# Altium PCB Optical Compresor_V1.PcbDoc (part 1 of 2)
Units mm, origin at the board's own origin, x right, y up, seen from the top; angles counter-clockwise.
Board outline 100 x 95 mm, 2 copper layers (Top Layer, Bottom Layer); 118 components, 73 nets, 334 pads, 87 vias.
Unrouted connection lines stored in the file: 63.
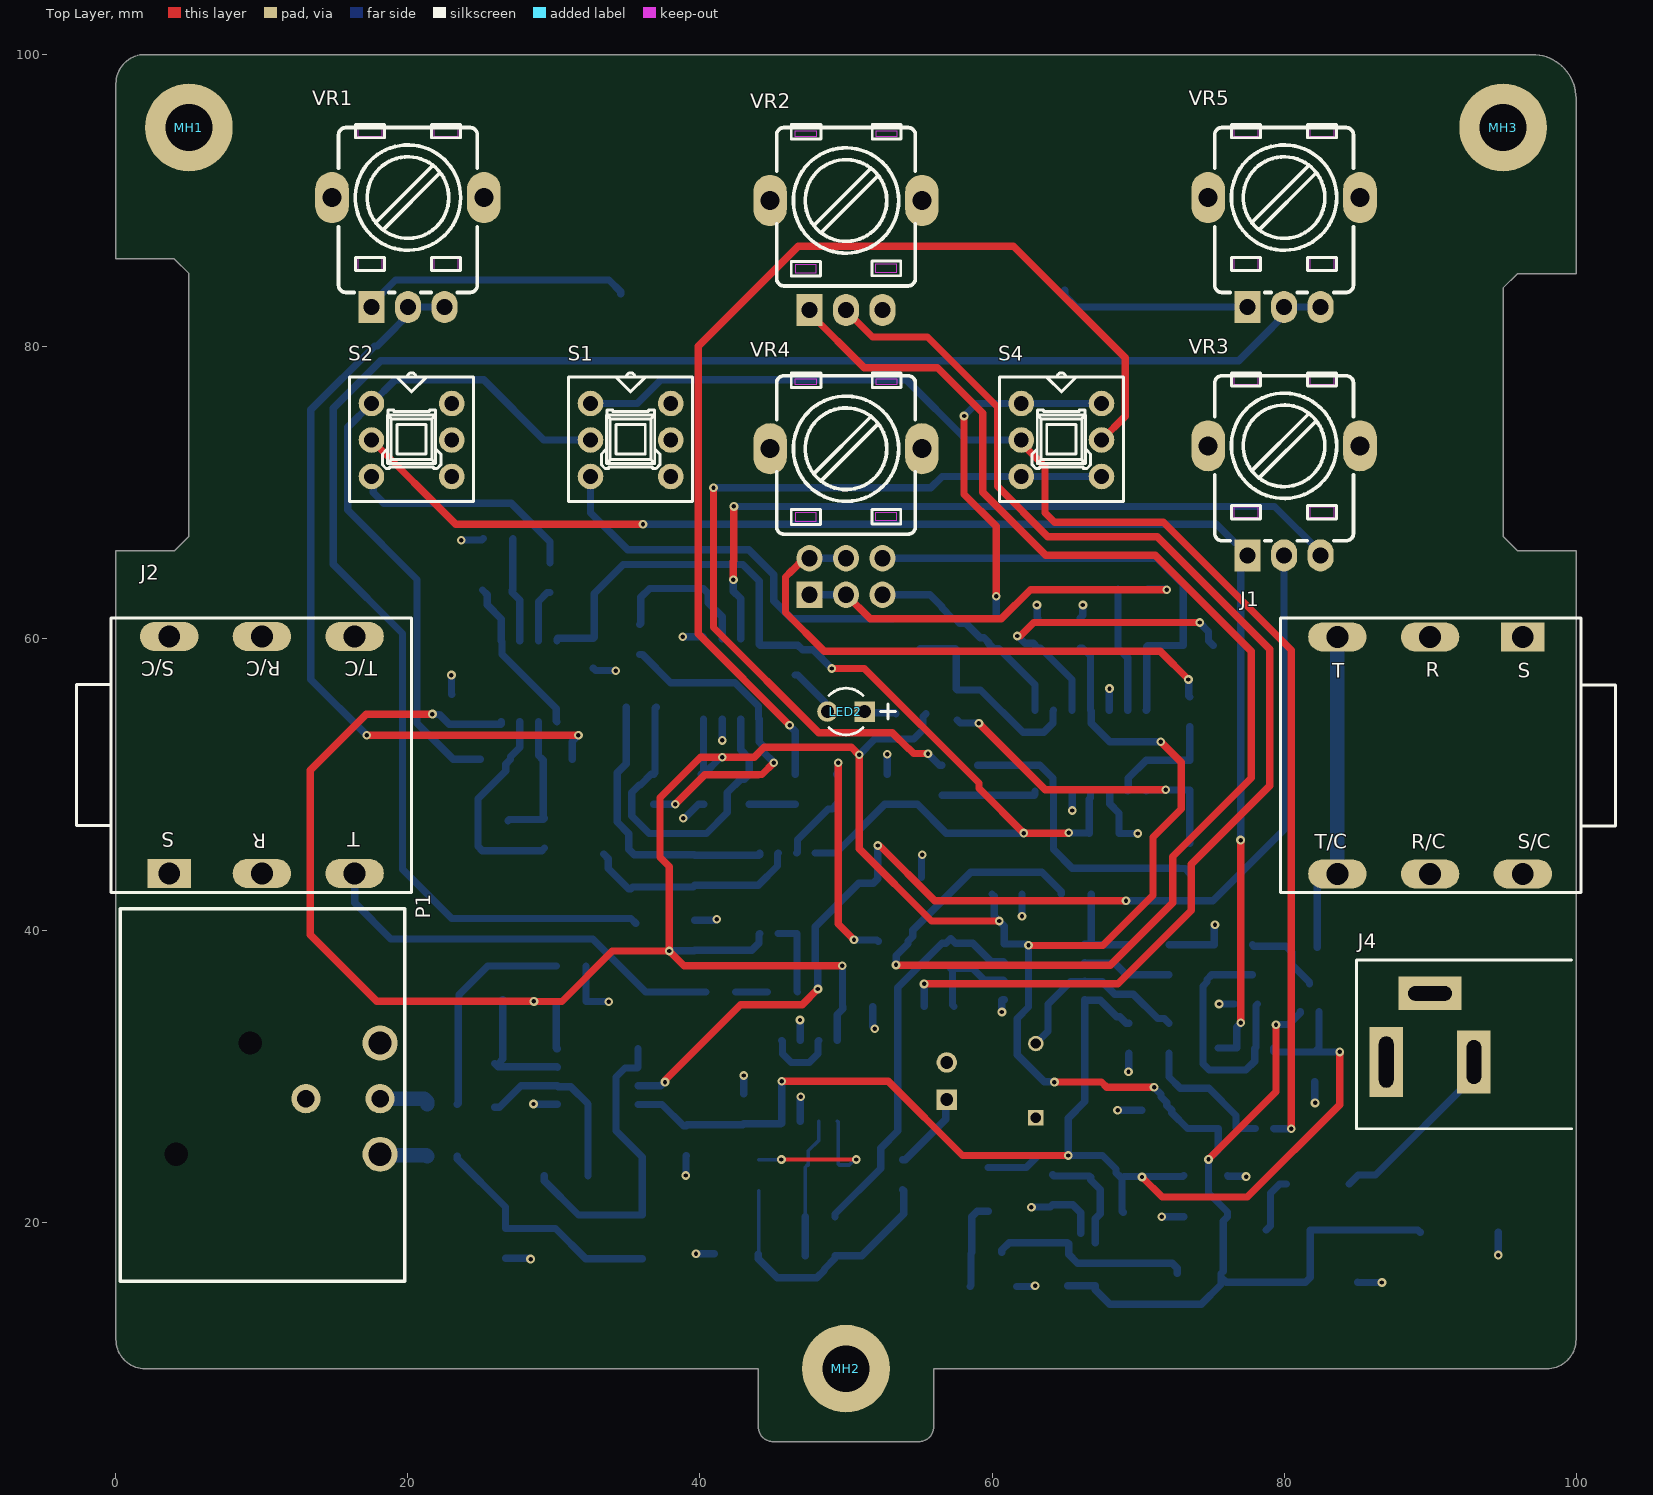
[diagram p0: Top Layer view]
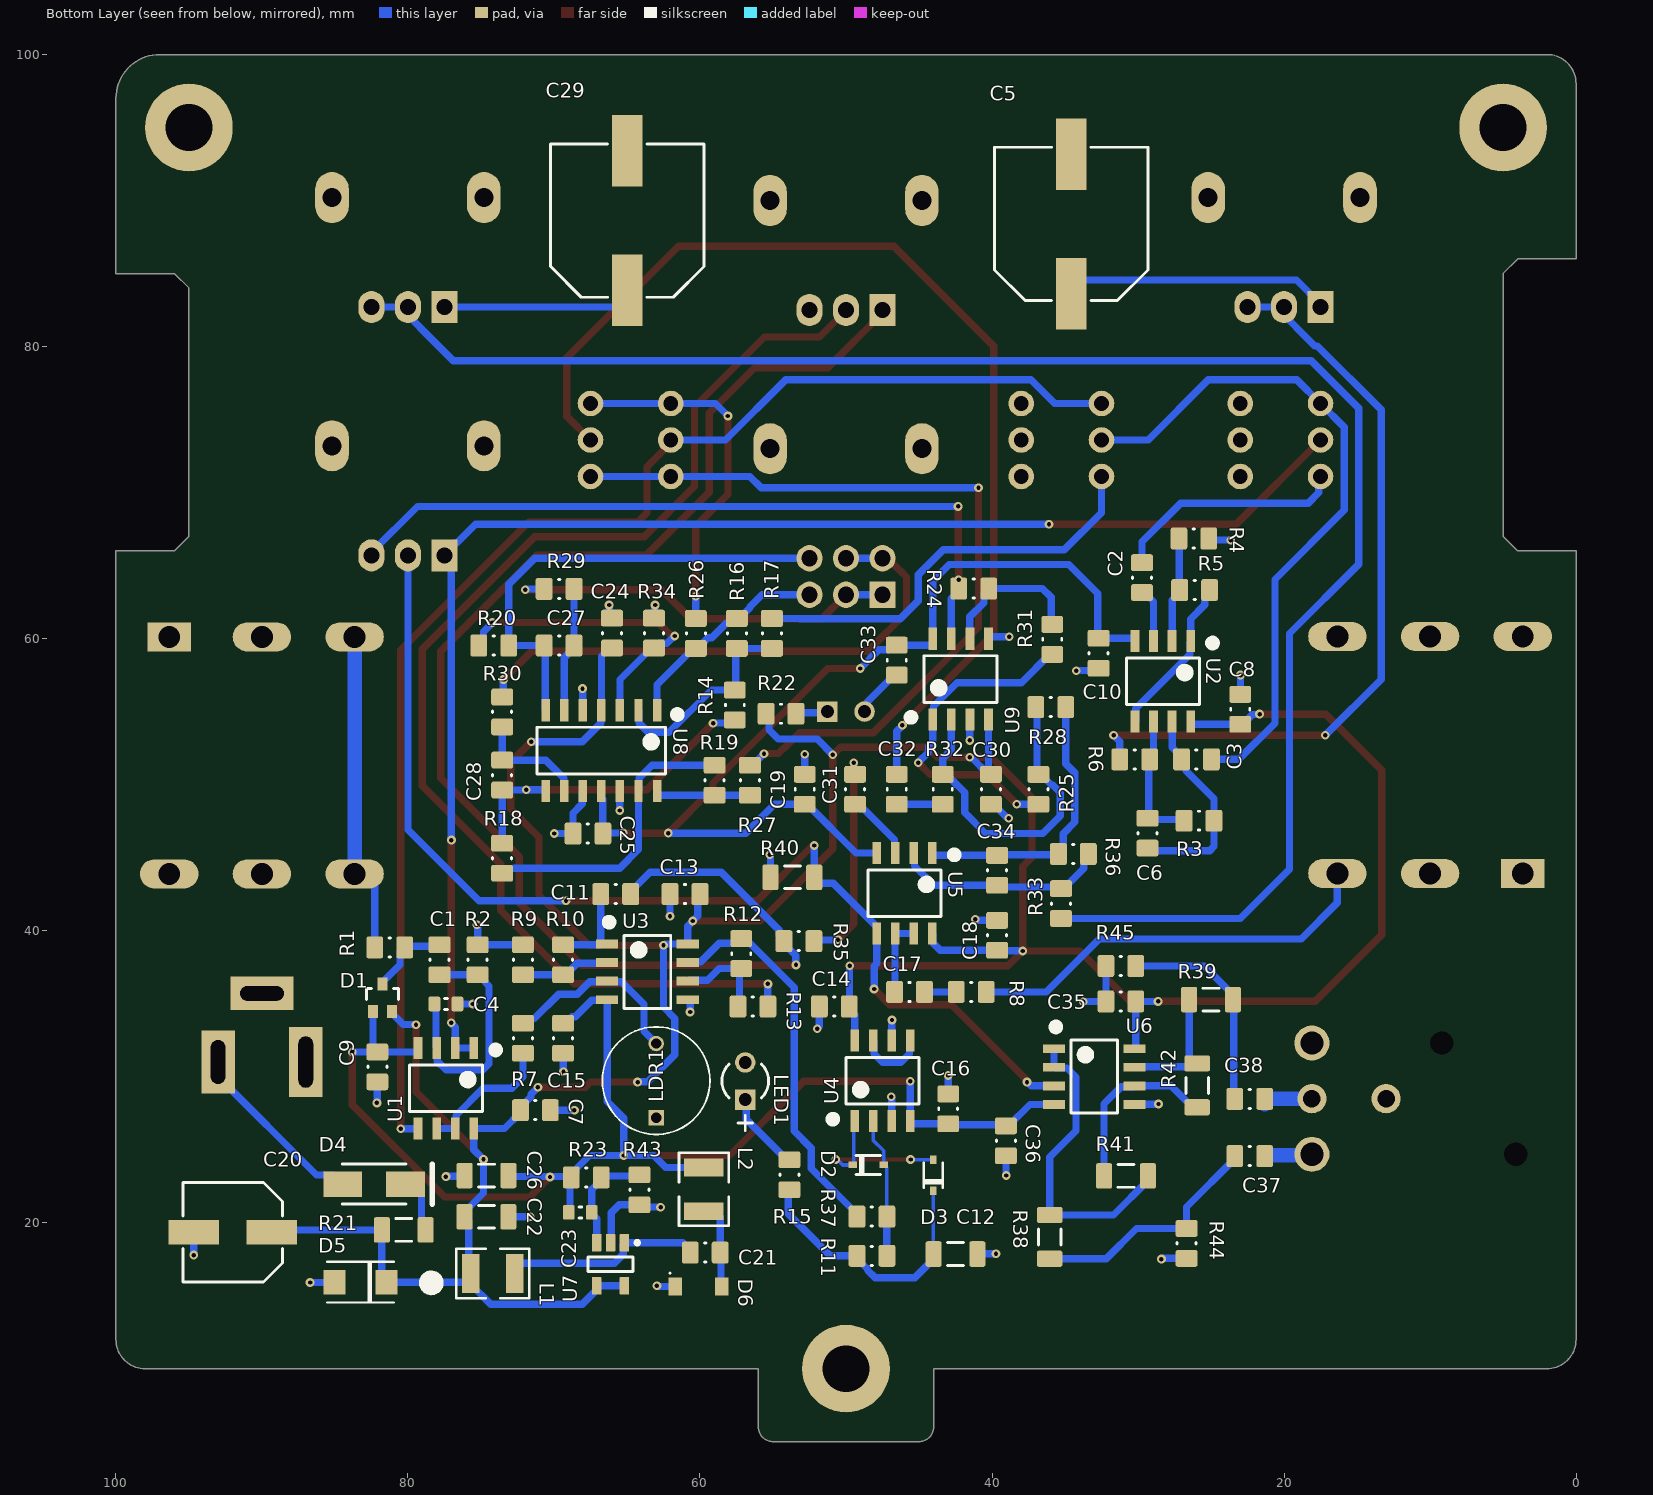
[diagram p1: Bottom Layer view, seen from below]
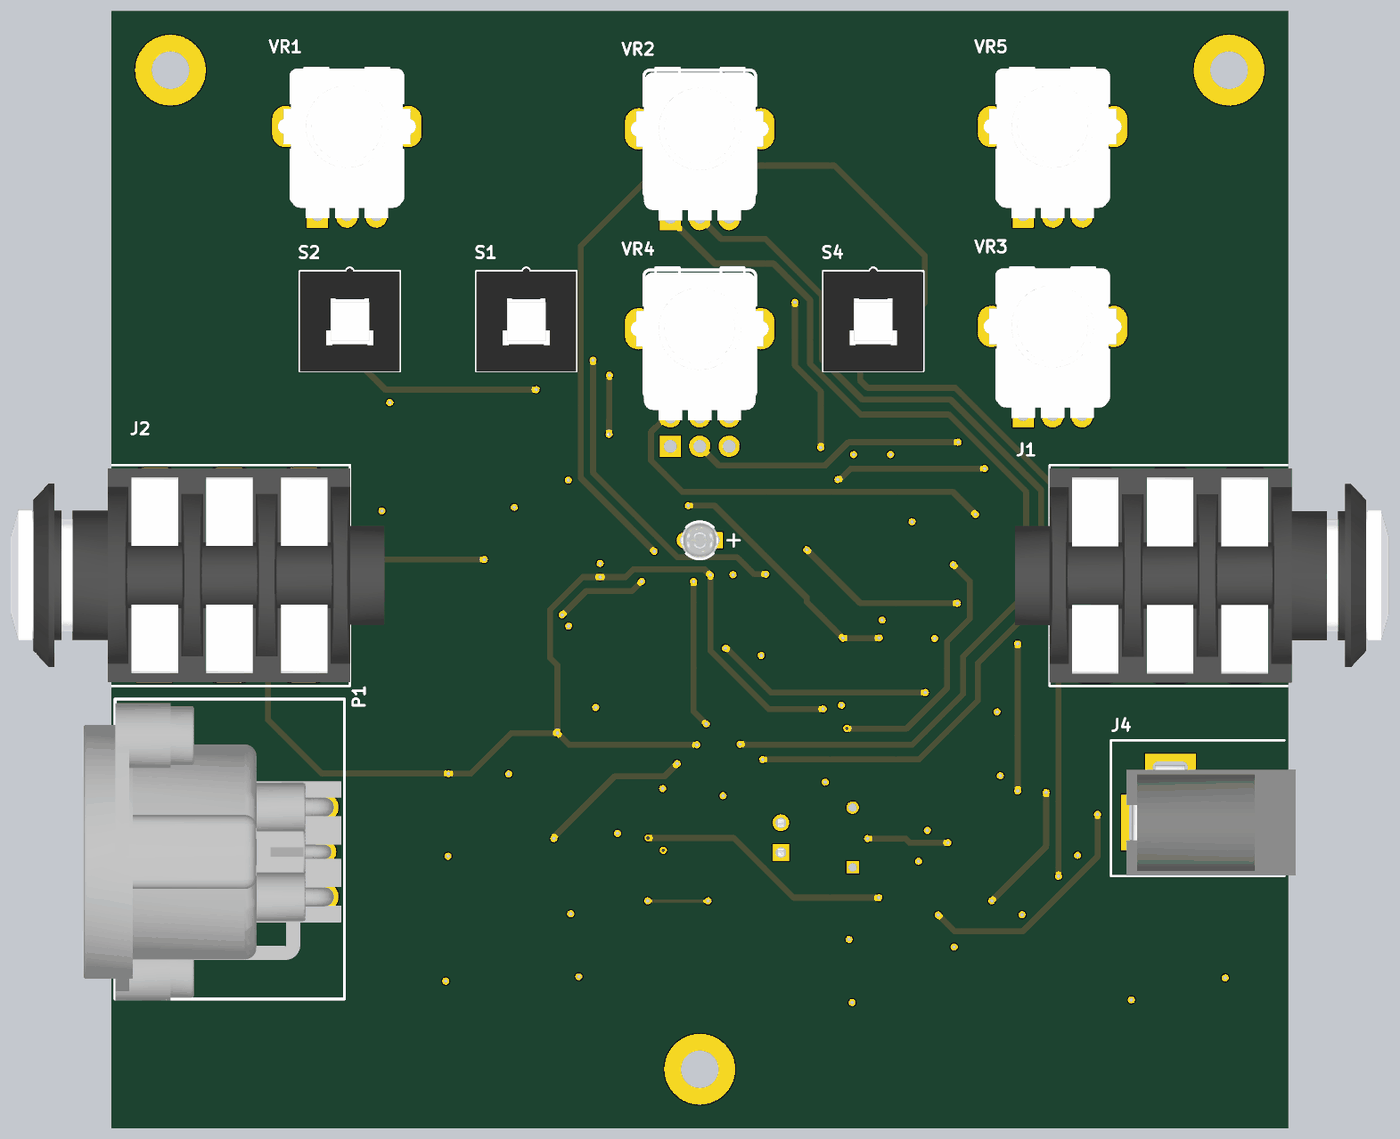
[diagram p2: 3D render of the assembled board from above, using the file's embedded part models]
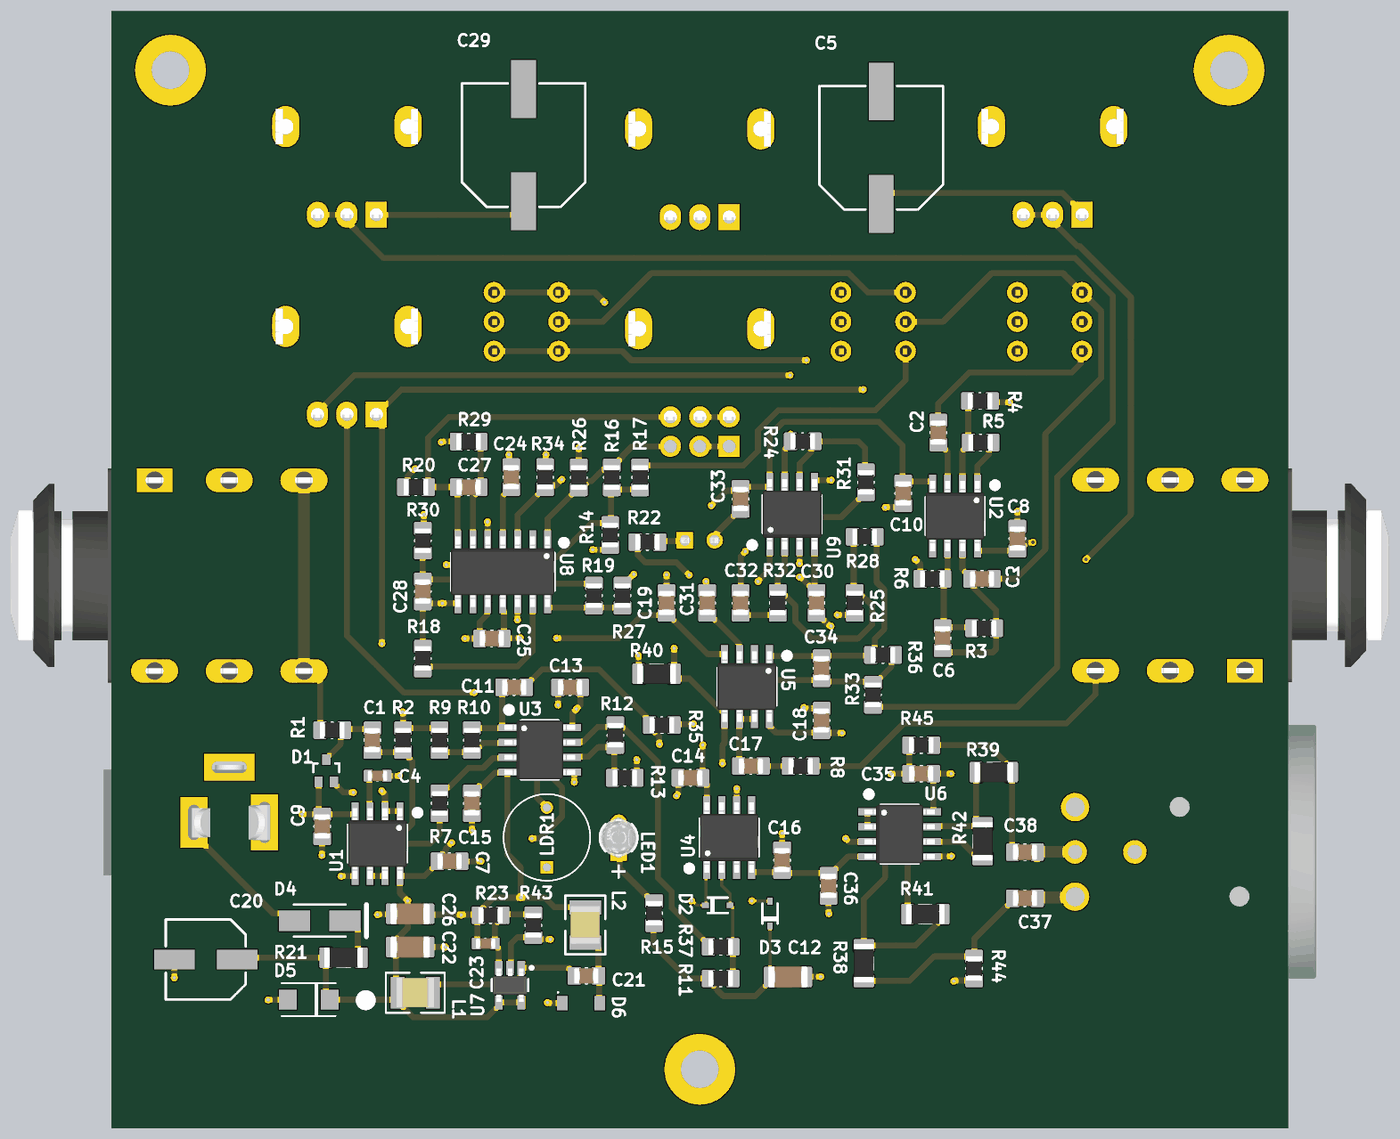
[diagram p3: 3D render of the assembled board from below, using the file's embedded part models]

## Layer stack, top to bottom
Top Solder: solder mask 0.0102, Solder Resist, Dk 3.5
Top Layer: signal copper 0.0356
Dielectric 1: dielectric 0.32, FR-4, Dk 4.8
Bottom Layer: signal copper 0.0356
Bottom Solder: solder mask 0.0102, Solder Resist, Dk 3.5

## Board outline
100,97 100,85 96,85 95,84 95,67 96,66 100,66 100,12 cw(c98,12) 98,10 56,10 56,6 cw(c55,6) 55,5 45.002,5 cw(c45,6) 44,6 44,10 2,10 cw(c2,12) 0,12 0,66 4,66 5,67 5,85 4,86 0,86 0,98 cw(c2,98) 2,100 97,100 cw(c97,97)

## Design rules (kind name [scope] priority, off if disabled: settings)
Clearance u7 [InComponent('U7')] p1: gap=0.3 ignorepadtopadclearanceinfootprint=FALSE
Clearance [All] p2: gap=0.5 ignorepadtopadclearanceinfootprint=FALSE
DiffPairsRouting [All] p1: maxlimit=0.25 minlimit=0.25 mostfreqgap=0.25 toplayer_minwidth=0.25 toplayer_maxwidth=1 toplayer_prefwidth=0.5 bottomlayer_minwidth=0.25 bottomlayer_maxwidth=1 bottomlayer_prefwidth=0.5 maxuncoupledlength=12.7
PolygonConnect [All] p1: connectstyle=Relief reliefconductorwidth=0.254 reliefentries=4 polygonreliefangle="90 Angle" airgapwidth=0.254
RoutingVias [All] p1: holewidth=0.3 width=0.6 viastyle="Through Hole" minholewidth=0.3 minwidth=0.6 maxholewidth=0.3 maxwidth=0.6
SolderMaskExpansion [All] p1: expansion=0.102 istentingtop=FALSE
Width [All] p1: maxlimit=1 minlimit=0.25 preferedwidth=0.5
29 further rules are at their usual default settings.

## Classes and differential pairs
component class S6: C20 C21 C22 C23 C26 D4 D5 D6 J4 L1 L2 LED2 R21 R22 R23 R43 U7
component class S5: C17 C18 C19 C35 C36 C37 C38 J2 P1 R8 R38 R39 R40 R41 R42 R44 R45 U6 VR3
component class S4: C29 C30 C31 C32 C33 C34 R24 R25 R28 R31 R32 R33 R35 R36 U5 U9 VR5
component class S3: C11 C12 C13 C14 C15 C16 D2 D3 LDR1 LED1 R7 R9 R10 R11 R12 R13 R15 R37 U3 U4 VR2
component class S2: C24 C25 C27 C28 R14 R16 R17 R18 R19 R20 R26 R27 R29 R30 S4 U8 VR4
component class S1: C1 C2 C3 C4 C5 C6 C7 C8 C9 C10 D1 J1 R1 R2 R3 R4 R5 R6 S2 U1 VR1
component class Main: MH1 MH2 MH3 S1
differential pair XLR_OUT: +XLR_OUT_P -XLR_OUT_N

## Components (designator, comment, footprint, x,y, rotation, side; value= is the part's Value field where it differs from the comment)
C1 "Cap 0805 100nF 4" 0805-CAP 77.837,38 r270 bottom value=100n
C2 "Cap 10nF 0805 C0G" 0805-CAP 29.725,64.175 r270 bottom
C3 "Cap 10nF 0805 C0G" 0805-CAP 26,51.725 r180 bottom
C4 "Cap 100pF 0603 C0G" 0603-CAP 77.4,34.975 r180 bottom
C5 "Cap pol 220µF 35V" "E-CAP, SMT, diameter 10mm, height 10.2mm" 34.575,88.4 r90 bottom
C6 "cap 0805 10pF" 0805-CAP 29.35,46.675 r270 bottom
C7 "Cap 0805 100nF 4" 0805-CAP 71.275,27.7 r0 bottom value=100n
C8 "Cap 0805 100nF 4" 0805-CAP 23,55.15 r270 bottom value=100n
C9 "Cap 0805 100nF 4" 0805-CAP 82.098,30.665 r270 bottom value=100n
C10 "Cap 0805 100nF 4" 0805-CAP 32.7,58.99 r270 bottom value=100n
C11 "Cap 10nF 0805 C0G" 0805-CAP 65.775,42.5 r180 bottom
C12 "Cap 1206 22uF" 1206-CAP 42.5,17.85 r0 bottom value=22uF
C13 "Cap 0805 100nF 4" 0805-CAP 61.025,42.5 r180 bottom value=100n
C14 "Cap 0805 100nF 4" 0805-CAP 50.798,34.8 r180 bottom value=100n
C15 "Cap 0805 100nF 4" 0805-CAP 69.375,32.625 r270 bottom value=100n
C16 "Cap 0805 100nF 4" 0805-CAP 43,27.791 r90 bottom value=100n
C17 "Cap 10nF 0805 C0G" 0805-CAP 45.65,35.8 r180 bottom
C18 "Cap 0805 100nF 4" 0805-CAP 39.65,39.675 r270 bottom value=100n
C19 "Cap 0805 100nF 4" 0805-CAP 52.825,49.675 r90 bottom value=100n
C20 "Cap pol 100µF 35V" "E-CAP, SMT, diameter 6.3mm, height 7.7mm" 92,19.34 r0 bottom
C21 "Cap 1µF 0805 X7R" 0805-CAP 59.645,17.95 r180 bottom
C22 "Cap 1206 22uF" 1206-CAP 74.625,20.4 r0 bottom value=22uF
C23 "Cap 0603 330pF" 0603-CAP 68.2,20.7 r0 bottom value=330pF
C24 "Cap 0805 100nF 4" 0805-CAP 66.025,60.375 r270 bottom value=100n
C25 "Cap 0805 100nF 4" 0805-CAP 67.675,46.65 r0 bottom value=100n
C26 "Cap 1206 22uF" 1206-CAP 74.625,23.225 r180 bottom value=22uF
C27 "Cap 10nF 0805 C0G" 0805-CAP 69.65,59.525 r0 bottom
C28 "Cap 10nF 0805 C0G" 0805-CAP 73.55,50.65 r270 bottom
C29 "Cap pol 220µF 35V" "E-CAP, SMT, diameter 10mm, height 10.2mm" 64.975,88.625 r90 bottom
C30 "Cap 0805 100nF 4" 0805-CAP 40.075,49.675 r90 bottom value=100n
C31 "Cap 10nF 0805 C0G" 0805-CAP 49.375,49.675 r270 bottom
C32 "Cap 10nF 0805 C0G" 0805-CAP 46.525,49.675 r270 bottom
C33 "Cap 0805 100nF 4" 0805-CAP 46.525,58.525 r270 bottom value=100n
C34 "cap 0805 10pF" 0805-CAP 39.65,44.125 r90 bottom
C35 "Cap 0805 100nF 4" 0805-CAP 31.175,35.15 r180 bottom value=100n
C36 "Cap 0805 100nF 4" 0805-CAP 39.05,25.6 r270 bottom value=100n
C37 "Cap 10nF 0805 C0G" 0805-CAP 22.35,24.55 r180 bottom
C38 "Cap 10nF 0805 C0G" 0805-CAP 22.35,28.475 r180 bottom
D1 "BAT54SWT1G" ONSC-SOT-323-3-419-04_V 81.75,35.4 r90 bottom
D2 "1N4148WS-7-F" 1N4148WS-7-F 48.475,23.95 r0 bottom
D3 "1N4148WS-7-F" 1N4148WS-7-F 44.025,23.248 r270 bottom
D4 "SS14" SS14 82.312,22.639 r180 bottom
D5 "SML4742-E3/5A" DO-214AC 85.025,15.925 r180 bottom
D6 "MBR0520-TP" SODFL370X135-2N 60.1,15.628 r180 bottom
J1 "Jack NMJ6HCD2" "Neutrik Jack metal nut" 90,52 r0 top locked
J2 "Jack NMJ6HCD2" "Neutrik Jack metal nut" 10,52.03 r180 top locked
J4 "DC Jack TH" DC_Jack 90.374,30.873 r180 top locked
L1 "15uH 20%" "1210 SMD Cap" 74.187,16.518 r180 bottom
L2 "15uH 20%" "1210 SMD Cap" 59.733,22.275 r90 bottom
LDR1 "NSL-5910" FB_28C0236-0JW-10 63,29.725 r90 bottom
LED1 "LED 3mm RED" KING-WP710A10QBCD_V 56.9,29.7 r90 bottom
LED2 "LED 3mm RED" KING-WP710A10QBCD_V 50,55 r180 top locked
MH1 "Mounting hole M3" "Mounting hole M3" 5,95 r0 top locked
MH2 "Mounting hole M3" "Mounting hole M3" 50,10 r0 top locked
MH3 "Mounting hole M3" "Mounting hole M3" 95,95 r0 top locked
P1 "Neutrik NC3MAH" "NC3MAH-0 XLR" 18.09,28.49 r90 top locked
R1 "Res 1k 1% 0805" 0805-RES 81.248,38.85 r180 bottom
R2 "Res 1M 1% 0805" 0805-RES 75.225,38 r90 bottom
R3 "Res 0805 330k 1%" 0805-RES 25.825,47.525 r180 bottom value=330k
R4 "Res 100k 1% 0805" 0805-RES 26.175,66.85 r0 bottom
R5 "Res 100k 1% 0805" 0805-RES 26.125,63.325 r180 bottom
R6 "Res 3.3k 1% 0805" 0805-RES 30.225,51.725 r180 bottom
R7 "Res 100k 1% 0805" 0805-RES 72.125,32.625 r270 bottom
R8 "Res 0805 100R 1%" 0805-RES 41.425,35.8 r0 bottom value=100R
R9 "Res 100k 1% 0805" 0805-RES 72.125,38 r90 bottom
R10 "Res 100k 1% 0805" 0805-RES 69.375,38 r270 bottom
R11 "Res 30k 1% 0805" 0805-RES 48.225,17.725 r180 bottom
R12 "Res 100k 1% 0805" 0805-RES 57.175,38.425 r90 bottom
R13 "Res 100k 1% 0805" 0805-RES 56.375,34.8 r0 bottom
R14 "Res 5.6k 1% 0805" 0805-RES 57.617,55.45 r270 bottom
R15 "Res 680R 1% 0805" 0805-RES 53.875,23.275 r270 bottom
R16 "Res 5.6k 1% 0805" 0805-RES 57.475,60.35 r90 bottom
R17 "Res 5.6k 1% 0805" 0805-RES 55.075,60.35 r270 bottom
R18 "Res 5.6k 1% 0805" 0805-RES 73.55,44.95 r270 bottom
R19 "Res 5.6k 1% 0805" 0805-RES 59,50.3 r270 bottom
R20 "Res 5.6k 1% 0805" 0805-RES 74.125,59.525 r180 bottom
R21 "Res 10R 1% 1206" 1206-RES 80.289,19.5 r0 bottom
R22 "Res 1k 1% 0805" 0805-RES 54.45,54.85 r0 bottom locked
R23 "Res 30k 1% 0805" 0805-RES 67.788,23.1 r0 bottom
R24 "Res 30k 1% 0805" 0805-RES 41.252,63.425 r0 bottom
R25 "Res 3.3k 1% 0805" 0805-RES 36.825,49.675 r270 bottom
R26 "Res 0805 100R 1%" 0805-RES 60.283,60.35 r270 bottom value=100R
R27 "Res 0805 100R 1%" 0805-RES 56.575,50.3 r270 bottom value=100R
R28 "Res 3.3k 1% 0805" 0805-RES 35.975,55.305 r0 bottom
R29 "Res 3.3k 1% 0805" 0805-RES 69.65,63.4 r180 bottom
R30 "Res 3.3k 1% 0805" 0805-RES 73.55,54.975 r270 bottom
R31 "Res 30k 1% 0805" 0805-RES 35.875,59.94 r270 bottom
R32 "Res 3.3k 1% 0805" 0805-RES 43.375,49.675 r90 bottom
R33 "Res 3.3k 1% 0805" 0805-RES 35.275,41.85 r90 bottom
R34 "Res 11.3k 1% 0805" 0805-RES 63.15,60.375 r90 bottom
R35 "Res 1k 1% 0805" 0805-RES 53.225,39.275 r180 bottom
R36 "Res 0805 330k 1%" 0805-RES 34.425,45.25 r0 bottom value=330k
R37 "Res 10k 1% 0805" 0805-RES 48.225,20.412 r0 bottom
R38 "Res 100R 1% 1206" 1206-RES 36.05,19.025 r90 bottom
R39 "Res 100R 1% 1206" 1206-RES 25,35.275 r0 bottom
R40 "Res 10k 1% 1206" 1206-RES 53.675,43.65 r180 bottom
R41 "Res 10k 1% 1206" 1206-RES 30.825,23.2 r0 bottom
R42 "Res 10k 1% 1206" 1206-RES 25.95,29.4 r90 bottom
R43 "Res 4.7k 1% 0805" 0805-RES 64.15,22.25 r270 bottom
R44 "Res 100k 1% 0805" 0805-RES 26.675,18.575 r90 bottom
R45 "Res 100k 1% 0805" 0805-RES 31.175,37.575 r0 bottom
S1 "Push Vertical Latching" "PUSH VERTICAL DPDT" 35.25,73.6 r0 top locked
S2 "Push Vertical Latching" "PUSH VERTICAL DPDT" 20.25,73.6 r0 top locked
S4 "Push Vertical Latching" "PUSH VERTICAL DPDT" 64.75,73.6 r0 top locked
U1 "TL072CD" SOIC8-127P600X175-8N 77.4,29.2 r270 bottom
U2 "MC33178D" SOIC8-127P600X175-8N 28.3,57.07 r270 bottom
U3 "TL072CD" SOIC8-127P600X175-8N 63.6,37.175 r180 bottom
U4 "TL072CD" SOIC8-127P600X175-8N 47.5,29.711 r90 bottom
U5 "MC33178D" SOIC8-127P600X175-8N 45.99,42.56 r270 bottom
U6 "TL072CD" SOIC8-127P600X175-8N 33,30 r180 bottom
U7 "LM2611BMF/NOPB" DBV0005A_M 66.125,17.15 r270 bottom
U8 "MC33179D" SOIC14-127P600X175-14N 66.75,52.325 r270 bottom
U9 "TL072CD" SOIC8-127P600X175-8N 42.15,57.225 r90 bottom
VR1 "Pot100kC 9mm" "LJV 9mm pot"#1 20,90.2 r0 top locked value=100kC
VR2 "Pot100kA 9mm" "LJV 9mm pot"#2 50,90 r0 top locked value=100kA
VR3 "Pot100kC 9mm" "LJV 9mm pot"#1 80,73.2 r0 top locked value=100kC
VR4 "Pot100kC DUAL LJV" "LJV 9MM DUAL" 50,73 r0 top locked value=100kC
VR5 "Pot100kC 9mm" "LJV 9mm pot"#1 80,90.2 r0 top locked value=100kC

## Footprints (in the part's own frame and the unit in brackets; to place one, negate y for a bottom-side part, rotate by r counter-clockwise, add the part's x,y. Pads: shape width x height; smd on the part's side, far side on the other; paste and mask are expansions set on the pad)
1N4148WS-7-F [mm] "SOD-323, 2-Leads, Body 1.7x1.3mm"
  rect 0.59x0.45 smd: 1(-1.055,0) 2(1.055,0)
  silkscreen extent -0.85,-0.65 0.85,0.65, body extent -0.85,-0.65 0.85,0.65, height 1.2
0603-CAP [mm] "Chip Capacitor, 2-Leads, Body 1.6x0.8mm, IPC Medium Density"
  rrect25% 0.8x1 smd: 1(-0.787,0) 2(0.787,0)
  silkscreen extent -0.1,-0.38 0.1,0.38, body extent -0.85,-0.45 0.85,0.45, height 0.9
0805-CAP [mm] "Chip Capacitor, 2-Leads, Body 2.00x1.25mm, IPC Low Density"
  rrect25% 1.15x1.5 smd: 1(-1.025,0) 2(1.025,0)
  silkscreen extent -0.05,-0.65 0.05,0.65, body extent -1.05,-0.67 1.05,0.68, height 1.35
0805-RES [mm] "Chip Resistor, 2-Leads, Body 2.00x1.25mm, IPC Low Density"
  rrect25% 1.15x1.5 smd: 1(-1.025,0) 2(1.025,0)
  silkscreen extent -0.05,-0.65 0.05,0.65, body extent -1.05,-0.67 1.05,0.68, height 0.6
1206-CAP [mm] "Chip Capacitor, 2-Leads, Body 3,20x1,60mm, IPC Medium Density"
  rrect25% 1.1x1.75 smd: 1(-1.5,0) 2(1.5,0)
  silkscreen extent -0.55,-0.77 0.55,0.77, body extent -1.7,-0.9 1.7,0.9, height 1.8
1206-RES [mm] "Chip Resistor, 2-Leads, Body 3,20x1,60mm, IPC Medium Density"
  rrect25% 1.1x1.75 smd: 1(-1.5,0) 2(1.5,0)
  silkscreen extent -0.55,-0.77 0.55,0.77, body extent -1.65,-0.85 1.65,0.85, height 0.65
"1210 SMD Cap" [mm] "Old footprint"
  rect 1.2x2.7 smd: 1(-1.5,0) 2(1.5,0)
  silkscreen extent -2.5,-1.7 2.5,1.7, body extent -1.6,-1.25 1.6,1.25, height 0.78
DBV0005A_M [mm] "SOT23, 5-Leads, Body 3.05x1.75mm, Pitch 0.95mm, IPC Low Density"
  rrect15% 1.2x0.65 smd: 1(-1.475,0.95) 2(-1.475,0) 3(-1.475,-0.95) 4(1.475,-0.95) 5(1.475,0.95)
  silkscreen extent -1.6,-1.55 0.5,1.95, body extent -1.42,-1.46 1.42,1.46, height 1.08
DC_Jack [mm]
  rect 2.3x4.8 hole 1 slot 3.5 at 90 deg: 1(3.374,-0.127)
  rect 2.3x4.3 hole 1 slot 3 at 90 deg: 2(-2.626,-0.127)
  rect 4.3x2.3 hole 1 slot 3 at 0 deg: 3(0.374,-4.827)
  silkscreen extent -9.33,-7.11 5.41,4.44, body extent -10.3,-5.01 4.1,4.39, height 11
DO-214AC [mil]
  rect 60x66 smd: 1(0,0) 2(140,0)
  silkscreen extent -20,-55 290,55
"E-CAP, SMT, diameter 6.3mm, height 7.7mm" [mm] "Aluminum Electrolytic Capacitor, Body 6,60x6,60x8,00mm, IPC Medium Density"
  rect 3.45x1.65 smd: 1(-2.675,0) 2(2.675,0)
  silkscreen extent -3.4,-3.4 3.4,3.4, body extent -3.4,-3.4 3.4,3.4, height 8
"E-CAP, SMT, diameter 10mm, height 10.2mm" [mm] "Aluminum Electrolytic Capacitor, Body 10,30x10,30x10,50mm, IPC Medium Density"
  rect 4.9x2.1 smd: 1(-4.775,0) 2(4.775,0)
  silkscreen extent -5.25,-5.25 5.25,5.25, body extent -5.25,-5.25 5.25,5.25, height 10.5
FB_28C0236-0JW-10 [mm]
  rect 1.06x1.06 hole 0.71: 1(-2.54,0)
  round 1.06 hole 0.71: 2(2.54,0)
  silkscreen extent -3.68,-3.68 3.68,3.68
KING-WP710A10QBCD_V [mm] "THD, 2-Leads, Dia 3.2mm"
  rect 1.4x1.4 hole 0.889 paste-0.025: 1(-1.27,0)
  round 1.4 hole 0.889 paste-0.025: 2(1.27,0)
  silkscreen extent -3.39,-1.6 1.16,1.6, body extent -1.62,-1.6 1.62,1.6, height 14.1
"LJV 9MM DUAL" [mm]
  rect 1.8x1.8 hole 1.1: 1(-2.5,-10)
  round 1.8 hole 1.1: 2(0,-10) 3(2.5,-10) 4(-2.5,-7.5) 5(0,-7.5) 6(2.5,-7.5)
  oval 2.3x3.5 hole 1.3: 7(-5.2,0) 8(5.2,0)
  Top Layer keep-out region: -2,4.75 -3.5,4.75 -3.5,4.4 -2,4.4
  Top Layer keep-out region: 3.525,4.75 2.025,4.75 2.025,4.4 3.525,4.4
  Top Layer keep-out region: 3.475,-4.375 2,-4.375 2,-4.9 3.475,-4.9
  Top Layer keep-out region: -2.025,-4.4 -3.475,-4.4 -3.475,-4.953 -2.025,-4.953
  silkscreen extent -4.75,-5.85 4.75,5.2, body extent -6.05,-7.8 6.05,4.8, height 23
"LJV 9mm pot"#1 [mm]
  rect 1.8x2.2 hole 1.1: 1(-2.5,-7.5)
  oval 1.8x2.2 hole 1.1: 2(0,-7.5) 3(2.5,-7.5)
  oval 2.3x3.5 hole 1.3: 4(-5.2,0) 5(5.2,0)
  Top Layer keep-out region: 1.751,4.2 3.451,4.2 3.451,4.9 1.751,4.9
  Top Layer keep-out region: -1.75,-4.199 -3.45,-4.199 -3.45,-4.899 -1.75,-4.899
  Top Layer keep-out region: 1.751,-4.899 3.451,-4.899 3.451,-4.199 1.751,-4.199
  Top Layer keep-out region: -1.75,4.9 -3.45,4.9 -3.45,4.2 -1.75,4.2
  silkscreen extent -4.75,-6.5 4.75,5, body extent -6.05,-7.8 6.05,4.8, height 23
"LJV 9mm pot"#2 [mm]
  rect 1.8x2.2 hole 1.1: 1(-2.5,-7.5)
  oval 1.8x2.2 hole 1.1: 2(0,-7.5) 3(2.5,-7.5)
  oval 2.3x3.5 hole 1.3: 4(-5.2,0) 5(5.2,0)
  Top Layer keep-out region: -2.025,-4.4 -3.475,-4.4 -3.475,-4.953 -2.025,-4.953
  Top Layer keep-out region: 3.475,-4.375 2,-4.375 2,-4.9 3.475,-4.9
  Top Layer keep-out region: 3.525,4.75 2.025,4.75 2.025,4.4 3.525,4.4
  Top Layer keep-out region: -2,4.75 -3.5,4.75 -3.5,4.4 -2,4.4
  silkscreen extent -4.75,-5.85 4.75,5.2, body extent -6.05,-7.8 6.05,4.8, height 23
"Mounting hole M3" [mm] "3.2 mm mounting hole for M3 screw"
  round 6 hole 3.2 paste+0: 1(0,0)
"NC3MAH-0 XLR" [mm]
  round 2.4 hole 1.6: 1(3.81,0) 2(-3.81,0)
  round 2 hole 1.2: 3(0,0) 4(0,5.08)
  round 0 hole 1.6 unplated: ""(-3.81,13.97) ""(3.81,8.89)
  silkscreen extent -12.5,-1.7 13,17.8, body extent -12.65,-1.42 12.65,20.48, height 25.25
"Neutrik Jack metal nut" [mm] "EMI Screen partno FCR14422"
  rect 3x2 hole 1.5: 1(6.35,8.115)
  oval 4x2 hole 1.5: 2(0,8.115) 3(-6.35,8.115) 4(-6.35,-8.115) 5(0,-8.115) 6(6.35,-8.115)
  silkscreen extent -10.25,-9.39 12.7,9.42, body extent -13.2,-9.1 18.6,9.1, height 15.93
ONSC-SOT-323-3-419-04_V [mm] "SOT23, 3-Leads, Body 2x1.25mm, Pitch 0.65mm"
  rect 0.9x0.7 smd: 1(-0.95,0.65) 2(-0.95,-0.65) 3(0.95,0)
  silkscreen extent -0.11,-1.1 0.63,1.1, body extent -0.63,-1 0.63,1, height 1
"PUSH VERTICAL DPDT" [mm]
  round 1.75 hole 1: 1(-2.75,0) 2(-2.75,2.5) 3(-2.75,-2.5) 4(2.75,0) 5(2.75,2.5) 6(2.75,-2.5)
  silkscreen extent -4.25,-4.2 4.25,4.6, body extent -4.25,-4.25 4.25,4.55, height 14.2
SODFL370X135-2N [mm] "SODFL, 2-Leads, Body 1.60x3.70mm, IPC Medium Density"
  rect 0.91x1.22 smd: 1(1.6,0) 2(-1.6,0)
  silkscreen extent -2,0.86 -1.91,0.96, body extent -1.42,-0.9 1.43,0.9, height 1.35
SOIC8-127P600X175-8N [mm] "SOIC, 8-Leads, Body 4,90x3,90mm, Pitch 1,27mm, IPC Medium Density"
  rect 1.52x0.6 smd: 1(-2.76,1.905) 2(-2.76,0.635) 3(-2.76,-0.635) 4(-2.76,-1.905) 5(2.76,-1.905) 6(2.76,-0.635) 7(2.76,0.635) 8(2.76,1.905)
  silkscreen extent -2.75,-2.5 1.6,3.52, body extent -3,-2.5 3,2.5, height 1.75
SOIC14-127P600X175-14N [mm] "SOIC, 14-Leads, Body 8,65x3,90mm, Pitch 1,27mm, IPC Medium Density"
  rect 1.52x0.58 smd: 1(-2.76,3.81) 2(-2.76,2.54) 3(-2.76,1.27) 4(-2.76,0) 5(-2.76,-1.27) 6(-2.76,-2.54) 7(-2.76,-3.81) 8(2.76,-3.81) 9(2.76,-2.54) 10(2.76,-1.27) 11(2.76,0) 12(2.76,1.27) 13(2.76,2.54) 14(2.76,3.81)
  silkscreen extent -2.6,-4.4 1.6,5.32, body extent -3,-4.4 3,4.4, height 1.75
SS14 [mm] "DO-214, 2-Leads, Body 4.375x2.725mm"
  rect 2.65x1.75 smd: A(-2.15,0) K(2.15,0)
  silkscreen extent -2.19,-1.36 3.98,1.36, body extent -2.19,-1.36 2.19,1.36, height 2.5

## Part data
C1 C7 C8 C9 C10 C13 C14 C15 C16 C18 C19 C24 C25 C30 C33 C35 C36: library part CMP-019-0144-11, "0.1uF 25volts C0G 5%", Design Item ID="Cap 0805 100nF 4", Fitted=Fitted, LatestRevisionDate=29-May-2009, LatestRevisionNote="IPC-7351 Footprint Added.", Mouser part=81-GRM31C5C1E104JA01, PackageDescription="Chip Capacitor", PackageReference=C1206, Published=8-Jun-2000, Publisher="Altium Limited", Source=main.SchLib
C2 C3 C11 C17 C27 C28 C31 C32 C37 C38: library part CMP-04096-2, "Cap 10nF 0805 C0G 50V +-5%", Capacitance=10nF, Dielectric=C0G, Maximum operating temperature=125°C, Rated Voltage=50V, Tolerance (+-)=5%, Height=950µm, Size (Imperial)=0805
C4: library part CMP-04086-2, "Cap 100pF 0603 C0G 50V +-5%", Capacitance=100pF, Dielectric=C0G, Maximum operating temperature=125°C, Rated Voltage=50V, Tolerance (+-)=5%, Height=900µm, Size (Imperial)=0603
C5 C29: library part CMP-00120-4, "Cap Aluminum 220uF 35V ±20% (10x10.2mm) SMD 2000h 85°C", + Tolerance=20%, Capacitance=220µF, Lifetime @ Max. Temp. (hours)=2000h, Maximum operating temperature=85°C, Rated Voltage=35V, - Tolerance=20%
C6 C34: library part CMP-019-0194-1, "Ceramic Capacitor, Multilayer, Ceramic, 25V, 5% +Tol, 5% -Tol, C0G, -/+30ppm/Cel TC, 0.00001uF, Surface Mount, 0805", Capacitance=10pF, Capacitor Type=Ceramic, Manufacturer Series=VJ, Max Operating Temperature=125°C, Min Operating Temperature=-55°C, Negative Tolerance=5%, Package Shape=Rectangular, Rated DC Voltage (URdc)=25V, Temperature Characteristics Code=C0G, Dielectric Material=Ceramic, JESD-609 Code=e3, Mount="Surface Mount", Multilayer=Yes, Number of Pins=2, Packaging="Tape and Reel", Positive Tolerance=5%, REACH SVHC=Yes, RoHS Compliant=Yes, Size Code=0805, Terminal Finish=Tin, Termination=Wraparound
C12 C22 C26: library part CMP-019-0043-11, "22uF, 25V, X5R, 20%", Capacitance=22uF, Case Code (Imperial)=1206, Case Code (Metric)=3216, Dielectric=X5R, Max Operating Temperature=85°C, Min Operating Temperature=-55°C, Tolerance=20%, Voltage Rating=25V, Case/Package=1206, Design Item ID="Cap 1206 22uF", Length=0.126inch, Mount="Surface Mount", Packaging="Tape and Reel", Pricing 1="1 = 0.72000, 10 = 0.51900, 50 = 0.51900, 100 = 0.34200, 1000 = 0.21500, 10000 = 0.15900 (USD)", RoHS=Yes, Source=main.SchLib, Stock 1=409, Thickness=0.02inch, Voltage Rating (DC)=25V, Width=0.063inch
C20: library part CMP-00119-4, "Cap Aluminum 100uF 35V ±20% (6.3x7.7mm) SMD 2000h 85°C", + Tolerance=20%, Capacitance=100µF, Lifetime @ Max. Temp. (hours)=2000h, Maximum operating temperature=85°C, Rated Voltage=35V, - Tolerance=20%
C21: library part CMP-04113-3, "Cap 1µF 0805 X7R 50V +-10%", Capacitance=1µF, Dielectric=X7R, Maximum operating temperature=125°C, Rated Voltage=50V, Tolerance (+-)=10%, Height=1.45mm, Size (Imperial)=0805
C23: library part CMP-019-0066-14, "330pF,  5%,  50V,  C0G", Capacitance=330pF, Case Code (Imperial)=0603, Case Code (Metric)=1608, Dielectric=C0G, Dielectric Material=Ceramic, Max Operating Temperature=125°C, Min Operating Temperature=-55°C, Package Quantity=1, Temperature Coefficient=30ppm/°C, Tolerance=5%, Voltage=50V, Case/Package=0603, ComponentLink1Description=https://datasheet.ciiva.com/144/docfinderpartnumber-c0603c331j5gactu-144424.pdf?src-supplier=Digi-Key, ComponentLink1URL=https://datasheet.ciiva.com/144/docfinderpartnumber-c0603c331j5gactu-144424.pdf?src-supplier=Digi-Key, ComponentLink2Description=https://datasheet.ciiva.com/14589/70095383-14589452.pdf?src-supplier=Allied+Electronics, ComponentLink2URL=https://datasheet.ciiva.com/14589/70095383-14589452.pdf?src-supplier=Allied+Electronics, ComponentLink3Description=https://datasheet.ciiva.com/7823/kem-c1003-c0g-smd-7823741.pdf?src-supplier=Element14, ComponentLink3URL=https://datasheet.ciiva.com/7823/kem-c1003-c0g-smd-7823741.pdf?src-supplier=Element14, ComponentLink4Description=https://datasheet.ciiva.com/7823/kem-c1003-c0g-smd-7823742.pdf?src-supplier=Element14, ComponentLink4URL=https://datasheet.ciiva.com/7823/kem-c1003-c0g-smd-7823742.pdf?src-supplier=Element14, ComponentLink5Description=https://datasheet.ciiva.com/14597/70095383-14597551.pdf?src-supplier=Allied+Electronics, ComponentLink5URL=https://datasheet.ciiva.com/14597/70095383-14597551.pdf?src-supplier=Allied+Electronics, Contact Material=Tin, Contact Plating=Tin,Matte, Depth=0.8mm, Design Item ID="Cap 0603 330pF", Dissipation Factor=0.5%, Height=0.8mm, Lead Free="Lead Free", Lead Pitch=0.7mm, Length=1.6mm, Mount="Surface Mount,PCB", Number of Pins=2, Packaging="Tape and Reel", Pricing 1="1=0,100000, 10=0,039000, 100=0,027000, 500=0,020000, 1000=0,016000, 4000=0,011000 (USD)", Radiation Hardening=No, REACH SVHC="No SVHC", RoHS=Yes, Source=main.SchLib, Stock 1=158995, Termination=SMD/SMT, Thickness=0.034inch, Voltage Rating=50V, Voltage Rating (DC)=50V, Width=0.8mm
D1: library part CMP-055-0001-A.2, "Rectifier Diode, Schottky, 2 Element, 0.2A, 30V V(RRM), Silicon", Average Rectified Current=200mA, Case/Package=SOT-323, Forward Voltage=800mV, Max Forward Surge Current (Ifsm)=600mA, Max Operating Temperature=125°C, Max Repetitive Reverse Voltage (Vrrm)=30V, Max Reverse Leakage Current=2uA, Min Operating Temperature=-65°C, Package Quantity=1, Power Dissipation=200mW, Contact Plating=Tin,Matte, Element Configuration=Dual, Forward Current=200mA, Height=0.9mm, Lead Free="Lead Free", Length=2.2mm, Max Reverse Voltage (DC)=30V, Max Surge Current=600mA, Mount="Surface Mount", Number of Pins=3, Packaging="Tape and Reel", Peak Non-Repetitive Surge Current=600mA, Peak Reverse Current=2uA, Radiation Hardening=No, REACH SVHC="No SVHC", Recovery Time=5ns, Reverse Recovery Time=5ns, Weight=0.03g, Width=1.35mm
D2 D3: library part CMP-029-0008-5, "Fast Switching Diode, 75 V, 0.3 A, -65 to 150 degC, 2-Pin SOD323, RoHS, Tape and Reel", Average Rectified Current=150mA, Capacitance=2pF, Current=2A, Forward Current=300mA, Forward Voltage=1.25V, Manufacturer=Pericom, Max Operating Temperature=150°C, Max Repetitive Reverse Voltage (Vrrm)=75V, Min Operating Temperature=-65°C, Package Quantity=3000, Peak Reverse Current=1uA, Power Dissipation=200mW, Available Preview Images=2D, ComponentLink1Description="Manufacturer URL", ComponentLink1URL=http://www.diodes.com/, ComponentLink2Description=Datasheet, ComponentLink2URL=http://www.diodes.com/datasheets/ds30097.pdf, ComponentLink3Description=https://datasheet.ciiva.com/16199/ds30097-16199061.pdf?src-supplier=Future+Electronics, ComponentLink3URL=https://datasheet.ciiva.com/16199/ds30097-16199061.pdf?src-supplier=Future+Electronics, ComponentLink4Description=https://datasheet.ciiva.com/16472/ds30097-16472599.pdf?src-supplier=Avnet+Asia, ComponentLink4URL=https://datasheet.ciiva.com/16472/ds30097-16472599.pdf?src-supplier=Avnet+Asia, ComponentLink5Description=https://datasheet.ciiva.com/1179/ds30097-1179355.pdf?src-supplier=Element14, ComponentLink5URL=https://datasheet.ciiva.com/1179/ds30097-1179355.pdf?src-supplier=Element14, ComponentLink6Description=https://datasheet.ciiva.com/8300/ds30097-8300396.pdf?src-supplier=Avnet, ComponentLink6URL=https://datasheet.ciiva.com/8300/ds30097-8300396.pdf?src-supplier=Avnet, ComponentLink7Description=https://datasheet.ciiva.com/911/ds30097-911741.pdf?src-supplier=Digi-Key, ComponentLink7URL=https://datasheet.ciiva.com/911/ds30097-911741.pdf?src-supplier=Digi-Key, ComponentLink8Description=https://datasheet.ciiva.com/911/ds30097-911742.pdf?src-supplier=Digi-Key, ComponentLink8URL=https://datasheet.ciiva.com/911/ds30097-911742.pdf?src-supplier=Digi-Key, ComponentLink9Description=https://datasheet.ciiva.com/25946/ds30097-25946926.pdf?src-supplier=Avnet+Europe, ComponentLink9URL=https://datasheet.ciiva.com/25946/ds30097-25946926.pdf?src-supplier=Avnet+Europe, ComponentLink10Description=https://datasheet.ciiva.com/911/ds30097-911743.pdf?src-supplier=Digi-Key, ComponentLink10URL=https://datasheet.ciiva.com/911/ds30097-911743.pdf?src-supplier=Digi-Key, ComponentLink11Description=http://datasheet.octopart.com/1N4148WS-7-F-Diodes-Inc.-datasheet-11839050.pdf?src-supplier=Newark, ComponentLink11URL=http://datasheet.octopart.com/1N4148WS-7-F-Diodes-Inc.-datasheet-11839050.pdf?src-supplier=Newark, ComponentLink12Description=http://datasheet.octopart.com/1N4148WS-7-F-Diodes-Inc.-datasheet-8329243.pdf?src-supplier=Newark, ComponentLink12URL=http://datasheet.octopart.com/1N4148WS-7-F-Diodes-Inc.-datasheet-8329243.pdf?src-supplier=Newark, ComponentLink13Description=http://datasheet.octopart.com/1N4148WS-7-F-Diodes-Inc.-datasheet-10031541.pdf?src-supplier=Newark, ComponentLink13URL=http://datasheet.octopart.com/1N4148WS-7-F-Diodes-Inc.-datasheet-10031541.pdf?src-supplier=Newark, ComponentLink14Description=http://datasheet.octopart.com/1N4148WS-7-F-Diodes-Inc.-datasheet-34441419.pdf?src-supplier=Allied+Electronics, ComponentLink14URL=http://datasheet.octopart.com/1N4148WS-7-F-Diodes-Inc.-datasheet-34441419.pdf?src-supplier=Allied+Electronics, ComponentLink15Description=http://datasheet.octopart.com/1N4148WS-7-F-Diodes-Inc.-datasheet-62305040.pdf?src-supplier=Element14, ComponentLink15URL=http://datasheet.octopart.com/1N4148WS-7-F-Diodes-Inc.-datasheet-62305040.pdf?src-supplier=Element14, ComponentLink16Description=http://datasheet.octopart.com/1N4148WS-7-F-Diodes-Inc.-datasheet-479.pdf?src-supplier=Mouser, ComponentLink16URL=http://datasheet.octopart.com/1N4148WS-7-F-Diodes-Inc.-datasheet-479.pdf?src-supplier=Mouser, ComponentLink17Description=http://datasheet.octopart.com/1N4148WS-7-F-Diodes-Inc.-datasheet-139480.pdf?src-supplier=Digi-Key, ComponentLink17URL=http://datasheet.octopart.com/1N4148WS-7-F-Diodes-Inc.-datasheet-139480.pdf?src-supplier=Digi-Key, ComponentLink18Description=http://datasheet.octopart.com/1N4148WS-7-F-Diodes-Inc.-datasheet-7284054.pdf?src-supplier=Jameco, ComponentLink18URL=http://datasheet.octopart.com/1N4148WS-7-F-Diodes-Inc.-datasheet-7284054.pdf?src-supplier=Jameco, ComponentLink19Description=http://datasheet.octopart.com/1N4148WS-7-F-Diodes-Inc.-datasheet-14053694.pdf?src-supplier=IIIC, ComponentLink19URL=http://datasheet.octopart.com/1N4148WS-7-F-Diodes-Inc.-datasheet-14053694.pdf?src-supplier=IIIC, ComponentLink20Description=http://datasheet.octopart.com/1N4148WS-7-F-Multicomp-datasheet-21397732.pdf?src-supplier=Newark, ComponentLink20URL=http://datasheet.octopart.com/1N4148WS-7-F-Multicomp-datasheet-21397732.pdf?src-supplier=Newark, ComponentLink21Description=http://datasheet.octopart.com/1N4148WS-7-F-Pericom-datasheet-62305040.pdf?src-supplier=Newark, ComponentLink21URL=http://datasheet.octopart.com/1N4148WS-7-F-Pericom-datasheet-62305040.pdf?src-supplier=Newark, Contact Plating=Tin, Current Rating=150mA, DatasheetVersion="Rev. 25-2, 03/2016", Design Item ID=1N4148WS-7-F, Element Configuration=Single, Height=1mm, Lead Free="Lead Free", Length=1.8mm, Manufacturer Part Number=1N4148WS-7-F, Max Forward Surge Current (Ifsm)=2A, Max Reverse Voltage (DC)=75V, Max Surge Current=2A, Mount="Surface Mount", Number of Pins=2, Output Current=150mA, PackageDescription="2-Pin Small Outline Diode, Body 1.7 x 1.3 mm", PackageReference=SOD323-2, Packaging="Tape and Reel", Peak Non-Repetitive Surge Current=2A, Polarity=Standard, Power Rating=200mW, Pricing 1="1 = 0.19000, 10 = 0.17100, 100 = 0.09320, 500 = 0.05736, 1000 = 0.03911 (USD)", Radiation Hardening=No, REACH SVHC="No SVHC", Recovery Time=4ns, Reverse Recovery Time=4ns, Source=main.SchLib, Stock 1=107341, Voltage=75V, Voltage Rating (DC)=75V, Weight=0.000173oz, Width=1.4mm
D4: library part CMP-029-0000-5, "ON SEMICONDUCTOR - SS14 - DIODE, SCHOTTKY, 1A, 40V, DO-214AC-2", Average Rectified Current=1A, Case/Package=SMA, Forward Voltage=500mV, Manufacturer="ON Semiconductor / Fairchild", Max Forward Surge Current (Ifsm)=40A, Max Operating Temperature=125°C, Max Power Dissipation=1.1W, Max Repetitive Reverse Voltage (Vrrm)=40V, Min Operating Temperature=-65°C, Package Quantity=7500, Peak Reverse Current=200uA, ComponentLink1Description=https://datasheet.ciiva.com/4713/ss14-197224-4713938.pdf?src-supplier=Mouser, ComponentLink1URL=https://datasheet.ciiva.com/4713/ss14-197224-4713938.pdf?src-supplier=Mouser, ComponentLink2Description=https://datasheet.ciiva.com/8303/ss19-8303766.pdf?src-supplier=Avnet, ComponentLink2URL=https://datasheet.ciiva.com/8303/ss19-8303766.pdf?src-supplier=Avnet, ComponentLink3Description=https://datasheet.ciiva.com/910/ss12-910695.pdf?src-supplier=Digi-Key, ComponentLink3URL=https://datasheet.ciiva.com/910/ss12-910695.pdf?src-supplier=Digi-Key, ComponentLink4Description=https://datasheet.ciiva.com/7965/1766303-7965241.pdf?src-supplier=Element14, ComponentLink4URL=https://datasheet.ciiva.com/7965/1766303-7965241.pdf?src-supplier=Element14, ComponentLink5Description=https://datasheet.ciiva.com/910/ss12-910696.pdf?src-supplier=Digi-Key, ComponentLink5URL=https://datasheet.ciiva.com/910/ss12-910696.pdf?src-supplier=Digi-Key, ComponentLink6Description=https://datasheet.ciiva.com/25951/ss19-25951496.pdf?src-supplier=Avnet+Europe, ComponentLink6URL=https://datasheet.ciiva.com/25951/ss19-25951496.pdf?src-supplier=Avnet+Europe, ComponentLink7Description=https://datasheet.ciiva.com/910/ss12-910697.pdf?src-supplier=Digi-Key, ComponentLink7URL=https://datasheet.ciiva.com/910/ss12-910697.pdf?src-supplier=Digi-Key, ComponentLink8Description=https://datasheet.ciiva.com/22651/1880990-22651980.pdf?src-supplier=Element14, ComponentLink8URL=https://datasheet.ciiva.com/22651/1880990-22651980.pdf?src-supplier=Element14, Current=1A, Current Rating=1A, Design Item ID=SS14, Element Configuration=Single, Forward Current=1A, Height=2.2mm, Lead Free="Lead Free", Length=4.75mm, Manufacturer Part Number=SS14, Max Reverse Voltage (DC)=40V, Mount="Surface Mount", Number of Elements=1, Number of Pins=2, Number of Terminals=2, Output Current=1A, Packaging="Tape and Reel", Peak Non-Repetitive Surge Current=40A, Polarity=Standard, Power Dissipation=1.1W, Pricing 1="1 = 0,42000, 10 = 0,29400, 50 = 0,29400, 100 = 0,13500, 1000 = 0,10400, 10000 = 0,08100 (USD)", Radiation Hardening=No, REACH SVHC="No SVHC", RoHS=Yes, Source=main.SchLib, Stock 1=302709, Termination=SMD/SMT, Voltage=40V, Voltage Rating (DC)=40V, Weight=0.003739oz, Width=2.95mm
D5: library part CMP-029-0015-3, "12V Zener", Case/Package=SMA, Manufacturer="Vishay Semiconductors", Max Operating Temperature=150°C, Max Power Dissipation=1W, Max Reverse Leakage Current=5uA, Min Operating Temperature=-65°C, Package Quantity=7500, Tolerance=10%, Zener Voltage=12V, ComponentLink1Description=https://media.digikey.com/pdf/Data%20Sheets/Vishay%20Siliconix%20PDFs/SML4728-SML4764A.pdf?src-supplier=Digi-Key, ComponentLink1URL=https://media.digikey.com/pdf/Data%20Sheets/Vishay%20Siliconix%20PDFs/SML4728-SML4764A.pdf?src-supplier=Digi-Key, ComponentLink2Description=http://www.mouser.com/ds/2/427/sml4728-67952.pdf?src-supplier=Mouser, ComponentLink2URL=http://www.mouser.com/ds/2/427/sml4728-67952.pdf?src-supplier=Mouser, ComponentLink3Description=http://www.vishay.com/docs/85782/sml4728.pdf?src-supplier=Avnet, ComponentLink3URL=http://www.vishay.com/docs/85782/sml4728.pdf?src-supplier=Avnet, Design Item ID=SML4742-E3/5A, Element Configuration=Single, Impedance=9R, Manufacturer Part Number=SML4742-E3/5A, Mount="Surface Mount", Mouser part=78-SML4742-E3/5A, Number of Pins=2, Packaging="Tape and Reel", Power Dissipation=1W, Pricing 1="1 = 0,50000, 10 = 0,42600, 25 = 0,39760, 100 = 0,31800, 250 = 0,29524, 500 = 0,24982, 1000 = 0,19305, 2500 = 0,17602 (USD)", Radiation Hardening=No, RoHS=Yes, Source=main.SchLib, Stock 1=7485, Voltage Tolerance=10%
D6: library part CMP-055-0006-A.3, "Rectifier Diode, Schottky, 1 Phase, 1 Element, 0.5A, 20V V(RRM), Silicon"
J1 J2: library part CMP-028-0060-3, "Jack 1/4 stereo switched - PCBH - chrome nut", Color=Black, Manufacturer=Neutrik, Manufacturer Part Number=NMJ6HCD2, Max Current Rating=3A, Max Operating Temperature=70°C, Min Operating Temperature=-25°C, Package Quantity=200, Voltage Rating=50V, ComponentLink1Description=https://datasheet.ciiva.com/16148/210-217181-16148163.pdf?src-supplier=Onlinecomponents.com, ComponentLink1URL=https://datasheet.ciiva.com/16148/210-217181-16148163.pdf?src-supplier=Onlinecomponents.com, ComponentLink2Description=http://datasheet.octopart.com/NMJ6HCD2-Neutrik-datasheet-46041.pdf?src-supplier=Allied+Electronics, ComponentLink2URL=http://datasheet.octopart.com/NMJ6HCD2-Neutrik-datasheet-46041.pdf?src-supplier=Allied+Electronics, ComponentLink3Description=http://datasheet.octopart.com/NMJ6HCD2-Neutrik-datasheet-66533984.pdf?src-supplier=Newark, ComponentLink3URL=http://datasheet.octopart.com/NMJ6HCD2-Neutrik-datasheet-66533984.pdf?src-supplier=Newark, Contact Material=Chrome, Contact Plating=Silver, Darkglass part=D00-0011, Depth=18.2mm, Design Item ID="Jack NMJ6HCD2", Gender=Female, Housing Material=Polyamide, Mount="Through Hole", Number of Contacts=2, Number of Ports=1, Number of Terminals=6, Orientation=Straight, Pricing 1="1 = 1.74000, 10 = 1.57000, 50 = 1.37000, 100 = 1.32000, 1000 = 1.24000, 10000 = 1.24000 (USD)", Selective Soldering=YES, Source=main.SchLib, Stock 1=16927, Supplied by Darkglass=YES, Termination=Solder, Weight=0.282192oz
J4: library part CMP-034-0002-1, "Low Voltage Power Supply Connector", ComponentLink1Description="Manufacturer Link", ComponentLink1URL=http://domino.kycon.com/internet/Products.html, Darkglass part=D00-0019, Design Item ID="DC Jack TH", Selective Soldering=Yes, Source=main.SchLib, Supplied by Darkglass=Yes
L1 L2: library part CMP-027-0005-1, "Fixed Inductors 15uH 20% 0.48ohm 0.98A AEC-Q200"
LDR1: "Ambient Light Sensors Hermetic Photocell"
LED1 LED2: library part CMP-036-0000-2, "THT LED round mono-color waterclear, WL-TMRW , RED", Emitting Color=RED, Manufacturer="Wuerth Elektronik", PartNumber=151034rs03000, Available Preview Images=2D, ComponentLink1Description="Manufacturer URL", ComponentLink1URL=http://www.we-online.com, ComponentLink2Description=Datasheet, ComponentLink2URL=http://katalog.we-online.de/pbs/datasheet/7448042001.pdfhttp://katalog.we-online.de/pbs/datasheet/7448042001.pdfhttp://katalog.we-online.de/pbs/datasheet/7448042001.pdfhttp://katalog.we-online.de/pbs/datasheet/151033BS03000.pdf, Darkglass=D00-0042, Darkglass part=D00-0042, Design Item ID="LED 3mm RED", Fitted=Fitted, Mouser part=710-151034RS03000, PackageReference="Type 3mm", Selective Soldering=YES, Source=main.SchLib, Supplied by Darkglass=YES
MH1 MH2 MH3: library part CMP-021-0014-4, "3.2 mm mounting hole for M3 screw", Design Item ID="Mounting hole M3", Source=jimi.SchLib
P1: library part CMP-028-0069-6, "Neutrik XLR NC3MAH", Color=Black, Current Rating=6A, Flammability Rating="UL94 V-0", Manufacturer=Neutrik, Manufacturer Part Number=NC3MAH, Max Operating Temperature=80°C, Min Operating Temperature=-30°C, Package Quantity=10, Ratings=IP40, Voltage Rating=50V, Approvals=UL, Body Material=Plastic, ComponentLink1Description=https://datasheet.ciiva.com/23762/312284-23762209.pdf?src-supplier=Newark, ComponentLink1URL=https://datasheet.ciiva.com/23762/312284-23762209.pdf?src-supplier=Newark, ComponentLink2Description=https://datasheet.ciiva.com/14118/hpnc3mah-14118008.pdf?src-supplier=Distrelec, ComponentLink2URL=https://datasheet.ciiva.com/14118/hpnc3mah-14118008.pdf?src-supplier=Distrelec, ComponentLink3Description=https://datasheet.ciiva.com/11720/0900766b80f3b31a-11720874.pdf?src-supplier=RSComponents, ComponentLink3URL=https://datasheet.ciiva.com/11720/0900766b80f3b31a-11720874.pdf?src-supplier=RSComponents, ComponentLink4Description=https://datasheet.ciiva.com/26947/getdatasheetpartid-563979-26947627.pdf?src-supplier=Verical, ComponentLink4URL=https://datasheet.ciiva.com/26947/getdatasheetpartid-563979-26947627.pdf?src-supplier=Verical, ComponentLink5Description=https://datasheet.ciiva.com/8007/312284-8007895.pdf?src-supplier=Element14, ComponentLink5URL=https://datasheet.ciiva.com/8007/312284-8007895.pdf?src-supplier=Element14, ComponentLink6Description=https://datasheet.ciiva.com/16147/nc3mah-16147837.pdf?src-supplier=Onlinecomponents.com, ComponentLink6URL=https://datasheet.ciiva.com/16147/nc3mah-16147837.pdf?src-supplier=Onlinecomponents.com, Contact Gender=Male, Contact Material=Brass, Contact Plating=Gold, Darkglass part=D00-0015, Depth=22.2mm, Design Item ID="Neutrik NC3MAH", Gender=Male, Housing Material=Polyamide, Length=25.35mm, Material=Plastic, Max Current Rating=6A, Mount=Panel, Number of Contacts=3, Number of Ports=1, Number of Positions=3, Number of Terminals=3, Orientation="Right Angle", Pricing 1="1 = 0,85000, 10 = 0,70700, 50 = 0,70700, 100 = 0,45600, 1000 = 0,36500, 10000 = 0,29600 (USD)", REACH SVHC="No SVHC", RoHS=Yes, Selective Soldering=Yes, Source=main.SchLib, Stock 1=3272, Supplied by Darkglass=Yes, Termination=Solder, Voltage Rating (DC)=50V, Weight=0.246918oz
R1 R22 R35: library part CMP-02472-2, "Resistor 1k +-1% 0805 Thin film 0.125W +-50ppm/°C", Maximum working voltage=150V, Power=125mW, Resistance=1k, Temperature Coefficient (ppm/°C)=50, Tolerance (+-)=1%, Composition="Thin film", Size (Imperial)=0805
R2: library part CMP-02809-2, "Resistor 1M +-1% 0805 Thin film 0.125W +-50ppm/°C", Maximum working voltage=150V, Power=125mW, Resistance=1M, Temperature Coefficient (ppm/°C)=50, Tolerance (+-)=1%, Composition="Thin film", Size (Imperial)=0805
R3 R36: library part CMP-037-0126-8, "330kohm, 125mW, 1%, thin film", Case Code (Imperial)=0805, Case Code (Metric)=2012, Max Operating Temperature=125°C, Max Power Dissipation=125mW, Min Operating Temperature=-55°C, Package Quantity=5000, Resistance=330kR, Temperature Coefficient=50ppm/°C, Tolerance=1%, Voltage Rating=150V, Case/Package=0805, ComponentLink1Description=https://datasheet.ciiva.com/5990/1392914-5990598.pdf?src-supplier=Farnell, ComponentLink1URL=https://datasheet.ciiva.com/5990/1392914-5990598.pdf?src-supplier=Farnell, ComponentLink2Description=https://datasheet.ciiva.com/5990/1392914-5990601.pdf?src-supplier=Farnell, ComponentLink2URL=https://datasheet.ciiva.com/5990/1392914-5990601.pdf?src-supplier=Farnell, ComponentLink3Description=https://datasheet.ciiva.com/2561/pyu-rt-1-to-0-05-rohs-l-5-2561162.pdf?src-supplier=Digi-Key, ComponentLink3URL=https://datasheet.ciiva.com/2561/pyu-rt-1-to-0-05-rohs-l-5-2561162.pdf?src-supplier=Digi-Key, Composition="Thin Film", Contact Plating=Tin, Depth=1.25mm, Design Item ID="Res 0805 330k 1%", Height=0.024inch, LatestRevisionDate=17-Jul-2002, LatestRevisionNote="Re-released for DXP Platform.", Lead Free="Lead Free", Length=0.079inch, Military Standard=Not, Number of Pins=2, Number of Terminations=2, PackageDescription="Axial Device, Thru-Hole; 2 Leads; 0.5 in Pin Spacing", PackageReference=AXIAL-0.5, Packaging="Tape and Reel", Power Rating=125mW, Pricing 1="1 = 0,10000, 10 = 0,09300, 100 = 0,03580, 1000 = 0,01573, 2500 = 0,01358 (USD)", Published=8-Jun-2000, Publisher="Altium Limited", Radiation Hardening=No, REACH SVHC="No SVHC", RoHS=Yes, Source=main.SchLib, Stock 1=1168, Termination=SMD/SMT, Voltage Rating (DC)=150V, Width=0.049inch
R4 R5 R7 R9 R10 R12 R13 R44 R45: library part CMP-02701-2, "Resistor 100k +-1% 0805 Thin film 0.125W +-50ppm/°C", Maximum working voltage=150V, Power=125mW, Resistance=100k, Temperature Coefficient (ppm/°C)=50, Tolerance (+-)=1%, Composition="Thin film", Size (Imperial)=0805
R6 R25 R28 R29 R30 R32 R33: library part CMP-02529-2, "Resistor 3.3k +-1% 0805 Thin film 0.125W +-50ppm/°C", Maximum working voltage=150V, Power=125mW, Resistance=3.3k, Temperature Coefficient (ppm/°C)=50, Tolerance (+-)=1%, Composition="Thin film", Size (Imperial)=0805
R8 R26 R27: library part CMP-037-0118-8, "100ohm, 125mW, 1%, thin film", Case Code (Imperial)=0805, Case Code (Metric)=2012, Max Operating Temperature=125°C, Max Power Dissipation=125mW, Min Operating Temperature=-55°C, Package Quantity=5000, Resistance=100R, Temperature Coefficient=50ppm/°C, Tolerance=1%, Voltage Rating=150V, Case/Package=0805, ComponentLink1Description=https://datasheet.ciiva.com/2560/pyu-rt-1-to-0-05-rohs-l-5-2560883.pdf?src-supplier=Digi-Key, ComponentLink1URL=https://datasheet.ciiva.com/2560/pyu-rt-1-to-0-05-rohs-l-5-2560883.pdf?src-supplier=Digi-Key, ComponentLink2Description=https://datasheet.ciiva.com/5624/pyu-rt-1-to-0-05-rohs-l-4-5624374.pdf?src-supplier=Mouser, ComponentLink2URL=https://datasheet.ciiva.com/5624/pyu-rt-1-to-0-05-rohs-l-4-5624374.pdf?src-supplier=Mouser, ComponentLink3Description=https://datasheet.ciiva.com/7942/442970-7942070.pdf?src-supplier=Element14, ComponentLink3URL=https://datasheet.ciiva.com/7942/442970-7942070.pdf?src-supplier=Element14, ComponentLink4Description=https://datasheet.ciiva.com/5925/442970-5925320.pdf?src-supplier=Farnell, ComponentLink4URL=https://datasheet.ciiva.com/5925/442970-5925320.pdf?src-supplier=Farnell, Composition="Thin Film", Contact Plating=Tin, Depth=1.25mm, Design Item ID="Res 0805 100R 1%", Features="Moisture Resistant", Height=0.024inch, LatestRevisionDate=17-Jul-2002, LatestRevisionNote="Re-released for DXP Platform.", Lead Free="Lead Free", Length=2mm, Military Standard=Not, Number of Pins=2, Number of Terminations=2, PackageDescription="Axial Device, Thru-Hole; 2 Leads; 0.5 in Pin Spacing", PackageReference=AXIAL-0.5, Packaging="Tape and Reel", Power Rating=125mW, Pricing 1="1 = 0,10000, 10 = 0,09300, 100 = 0,03580, 1000 = 0,01573, 2500 = 0,01358 (USD)", Published=8-Jun-2000, Publisher="Altium Limited", Radiation Hardening=No, REACH SVHC="No SVHC", RoHS=Yes, Source=main.SchLib, Stock 1=52567, Termination=SMD/SMT, Voltage Rating (DC)=150V, Weight=0.000194oz, Width=0.049inch
R11 R23 R24 R31: library part CMP-02638-2, "Resistor 30k +-1% 0805 Thin film 0.125W +-50ppm/°C", Maximum working voltage=150V, Power=125mW, Resistance=30k, Temperature Coefficient (ppm/°C)=50, Tolerance (+-)=1%, Composition="Thin film", Size (Imperial)=0805
R14 R16 R17 R18 R19 R20: library part CMP-02557-2, "Resistor 5.6k +-1% 0805 Thin film 0.125W +-50ppm/°C", Maximum working voltage=150V, Power=125mW, Resistance=5.6k, Temperature Coefficient (ppm/°C)=50, Tolerance (+-)=1%, Composition="Thin film", Size (Imperial)=0805
R15: library part CMP-02452-2, "Resistor 680R +-1% 0805 Thin film 0.125W +-50ppm/°C", Maximum working voltage=150V, Power=125mW, Resistance=680, Temperature Coefficient (ppm/°C)=50, Tolerance (+-)=1%, Composition="Thin film", Size (Imperial)=0805
R21: library part CMP-02882-2, "Resistor 10R +-1% 1206 Thin film 0.25W +-50ppm/°C", Maximum working voltage=200V, Power=250mW, Resistance=10, Temperature Coefficient (ppm/°C)=50, Tolerance (+-)=1%, Composition="Thin film", Size (Imperial)=1206
R34: library part CMP-02591-2, "Resistor 11.3k +-1% 0805 Thin film 0.125W +-50ppm/°C", Maximum working voltage=150V, Power=125mW, Resistance=11.3k, Temperature Coefficient (ppm/°C)=50, Tolerance (+-)=1%, Composition="Thin film", Size (Imperial)=0805
R37: library part CMP-02586-2, "Resistor 10k +-1% 0805 Thin film 0.125W +-50ppm/°C", Maximum working voltage=150V, Power=125mW, Resistance=10k, Temperature Coefficient (ppm/°C)=50, Tolerance (+-)=1%, Composition="Thin film", Size (Imperial)=0805
R38 R39: library part CMP-03662-2, "Resistor 100R +-1% 1206 Thin film 0.25W +-50ppm/°C", Maximum working voltage=200V, Power=250mW, Resistance=100, Temperature Coefficient (ppm/°C)=50, Tolerance (+-)=1%, Composition="Thin film", Size (Imperial)=1206
R40 R41 R42: library part CMP-03860-2, "Resistor 10k +-1% 1206 Thin film 0.25W +-50ppm/°C", Maximum working voltage=200V, Power=250mW, Resistance=10k, Temperature Coefficient (ppm/°C)=50, Tolerance (+-)=1%, Composition="Thin film", Size (Imperial)=1206
R43: library part CMP-02548-2, "Resistor 4.7k +-1% 0805 Thin film 0.125W +-50ppm/°C", Maximum working voltage=150V, Power=125mW, Resistance=4.7k, Temperature Coefficient (ppm/°C)=50, Tolerance (+-)=1%, Composition="Thin film", Size (Imperial)=0805
S1 S2 S4: library part CMP-028-0063-7, "DPDT Pushbutton Latching", Current Rating=100mA, Manufacturer=E-Switch, Manufacturer Part Number=TL2201EEXA, Max Voltage Rating (DC)=30V, Operating Force=2.16N, Package Quantity=700, Actuator Length=3mm, ComponentLink1Description=https://datasheet.ciiva.com/2879/p010350g-2879559.pdf?src-supplier=Digi-Key, ComponentLink1URL=https://datasheet.ciiva.com/2879/p010350g-2879559.pdf?src-supplier=Digi-Key, ComponentLink2Description=https://datasheet.ciiva.com/16156/p010350f-16156301.pdf?src-supplier=Onlinecomponents.com, ComponentLink2URL=https://datasheet.ciiva.com/16156/p010350f-16156301.pdf?src-supplier=Onlinecomponents.com, Contact Material=Silver, Darkglass part=D00-0005, Design Item ID="Push Vertical", Electrical Life=10000Cycles, Lead Free="Lead Free", Mount="Through Hole", Orientation=Straight, Packaging=Bulk, Pricing 1="1=0,70000, 10=0,66300, 25=0,63400, 50=0,60400, 100=0,58900, 250=0,57400, 500=0,54500, 1000=0,51500, 2500=0,49200, 10000=0,49200 (USD)", RoHS=Yes, Selective Soldering=YES, Source=main.SchLib, Stock 1=351, Supplied by Darkglass=YES, Switch Function=On-On, Termination="PC Pin", Throw Configuration=DPDT, Voltage Rating (DC)=30V
U1 U3 U4 U6 U9: library part CMP-028-0012-7, "Operational Amplifiers - Op Amps Dual Low Noise JFET SOIC8", Case/Package=D, Dual Supply Voltage=9V, Input Bias Current=200pA, Input Offset Voltage (Vos)=3mV, Manufacturer 1="Texas Instruments", Max Dual Supply Voltage=18V, Max I/O Voltage=10mV, Max Operating Temperature=85°C, Min Dual Supply Voltage=3.5V, Min Operating Temperature=-40°C, Nominal Supply Current=5mA, Operating Supply Current=1.4mA, Package Quantity=75, Voltage Gain=106.02dB, Bandwidth=3MHz, Common Mode Rejection Ratio=70dB, ComponentLink1Description=http://www.ti.com/general/docs/lit/getliterature.tsp?genericPartNumber=TL072&&fileType=pdf&src-supplier=Avnet, ComponentLink1URL=http://www.ti.com/general/docs/lit/getliterature.tsp?genericPartNumber=TL072&&fileType=pdf&src-supplier=Avnet, ComponentLink2Description=https://www.distrelec.biz/Web/Downloads/_t/ds/tl07x-series_eng_tds.pdf?mime=application%2Fpdf&src-supplier=Distrelec, ComponentLink2URL=https://www.distrelec.biz/Web/Downloads/_t/ds/tl07x-series_eng_tds.pdf?mime=application%2Fpdf&src-supplier=Distrelec, ComponentLink3Description=http://www.ti.com/lit/ds/symlink/tl071a.pdf?src-supplier=Digi-Key, ComponentLink3URL=http://www.ti.com/lit/ds/symlink/tl071a.pdf?src-supplier=Digi-Key, ComponentLink4Description=http://www.farnell.com/datasheets/1862384.pdf?src-supplier=Element14, ComponentLink4URL=http://www.farnell.com/datasheets/1862384.pdf?src-supplier=Element14, ComponentLink5Description=http://focus.ti.com/lit/ds/symlink/tl074.pdf?src-supplier=Avnet+Asia, ComponentLink5URL=http://focus.ti.com/lit/ds/symlink/tl074.pdf?src-supplier=Avnet+Asia, Design Item ID=TL072CD, Gain Bandwidth Product=3MHz, Height=1.58mm, Lead Free="Lead Free", Length=4.9mm, Manufacturer Part Number 1=TL072CD, Nominal Gain Bandwidth Product=3MHz, Number of Amplifiers=2, Number of Channels=2, Number of Circuits=2, Number of Elements=2, Number of Pins=8, Operating Supply Voltage=18V, Packaging=Rail/Tube, Pricing 1="1 = 0.71000, 10 = 0.59500, 50 = 0.59500, 100 = 0.38400, 1000 = 0.30700, 10000 = 0.25000 (USD)", Radiation Hardening=No, REACH SVHC="No SVHC", RoHS=Yes, Slew Rate=13V/µs, Source=main.SchLib, Stock 1=14514, Unity Gain Bandwidth Product=3MHz, Width=3.91mm